# Altium PCB Copy of PCB1.PcbDoc
Units mm, origin at the board's own origin, x right, y up, seen from the top; angles counter-clockwise.
Board outline 40.89 x 79.88 mm, 2 copper layers (Top Layer, Bottom Layer); 35 components, 27 nets, 153 pads, 14 vias.
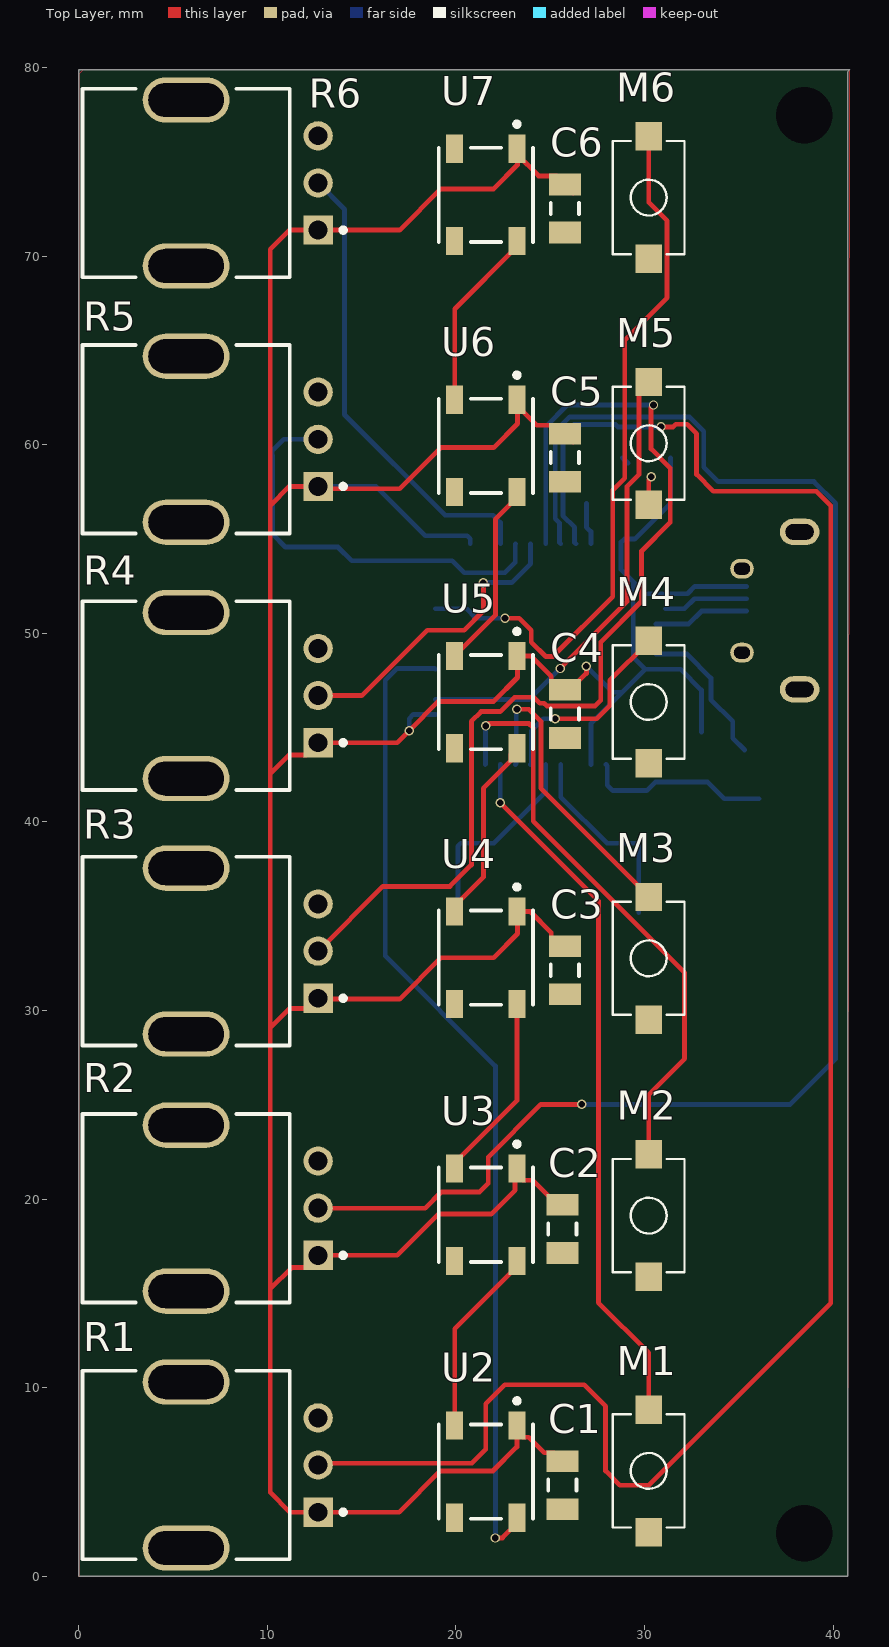
[diagram p0: Top Layer view]
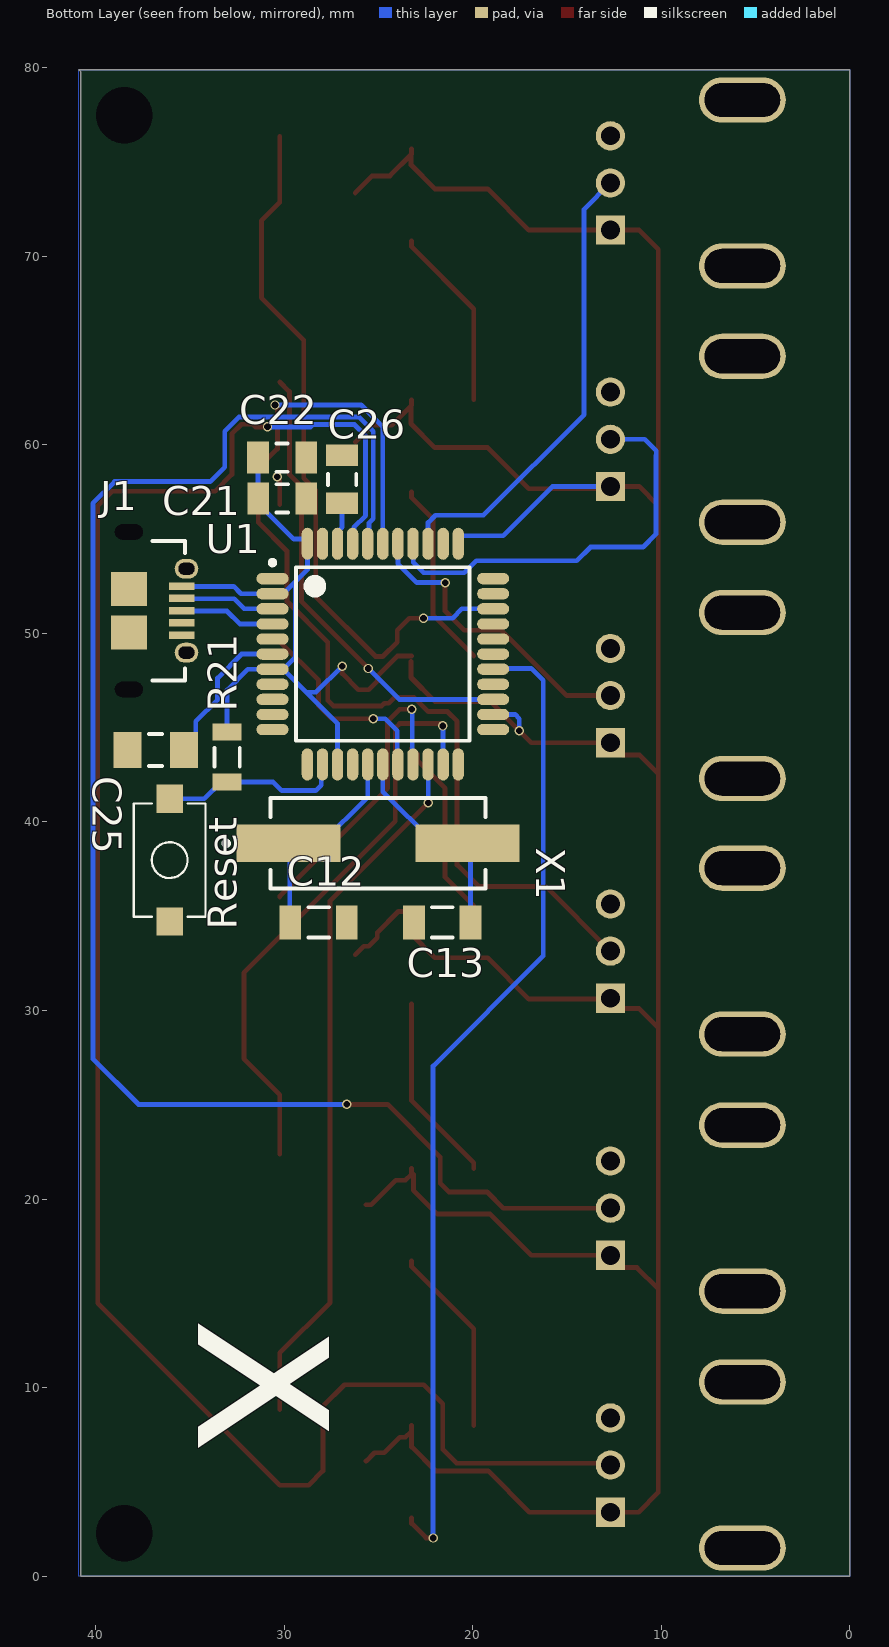
[diagram p1: Bottom Layer view, seen from below]

## Layer stack, top to bottom
Top Solder: solder mask 0.0102, Solder Resist, Dk 3.5
Top Layer: signal copper 0.0356
Dielectric 1: dielectric 0.32, FR-4, Dk 4.8
Bottom Layer: signal copper 0.0356
Bottom Solder: solder mask 0.0102, Solder Resist, Dk 3.5

## Board outline
0,0 40.767,0 40.767,79.756 40.894,79.883 0,79.883

## Design rules (kind name [scope] priority, off if disabled: settings)
AssemblyTestPointUsage [All] p0: scope1count=1 scope1_0_kind=Board scope1_0_value=Board scope2count=1 scope2_0_kind=Board scope2_0_value=Board commentlength=0
AssemblyTestpoint [All] p0: scope1count=1 scope1_0_kind=Board scope1_0_value=Board scope2count=1 scope2_0_kind=Board scope2_0_value=Board commentlength=0
Clearance [All] p0: scope1count=1 scope1_0_kind=Board scope1_0_value=Board scope2count=1 scope2_0_kind=Board scope2_0_value=Board commentlength=0 gap=0.15
Clearance [All] p1: gap=0.15 ignorepadtopadclearanceinfootprint=FALSE except(0: Arc-Hole Track-Hole THPad-Hole Via-Hole Fill-Hole Poly-Hole Region-Hole Text-Hole)
ComponentClearance [All] p0: scope1count=1 scope1_0_kind=Board scope1_0_value=Board scope2count=1 scope2_0_kind=Board scope2_0_value=Board commentlength=0 gap=0.254 collisioncheckmode=3
DiffPairsRouting [All] p0: scope1count=1 scope1_0_kind=Board scope1_0_value=Board scope2count=1 scope2_0_kind=Board scope2_0_value=Board commentlength=0
FabricationTestPointUsage [All] p0: scope1count=1 scope1_0_kind=Board scope1_0_value=Board scope2count=1 scope2_0_kind=Board scope2_0_value=Board commentlength=0 valid=0 allowmultiple=FALSE
FabricationTestpoint [All] p0: scope1count=1 scope1_0_kind=Board scope1_0_value=Board scope2count=1 scope2_0_kind=Board scope2_0_value=Board commentlength=0 side=3 testpointundercomponent=TRUE minsize=1.016 maxsize=2.54 preferedsize=1.524 minholesize=0 maxholesize=1.016 preferedholesize=0.813 testpointgrid=0.025
FanoutControl Fanout_BGA [All] p0 off: scope1count=1 scope1_0_kind=Board scope1_0_value=Board scope2count=1 scope2_0_kind=Board scope2_0_value=Board commentlength=69 // Protel DXP Scope 1 Expression Was: IsBGA   Fanout_BGA (Default Rule)
FanoutControl Fanout_LCC [All] p0 off: scope1count=1 scope1_0_kind=Board scope1_0_value=Board scope2count=1 scope2_0_kind=Board scope2_0_value=Board commentlength=69 // Protel DXP Scope 1 Expression Was: IsLCC   Fanout_LCC (Default Rule)
FanoutControl Fanout_SOIC [All] p0 off: scope1count=1 scope1_0_kind=Board scope1_0_value=Board scope2count=1 scope2_0_kind=Board scope2_0_value=Board commentlength=71 // Protel DXP Scope 1 Expression Was: IsSOIC   Fanout_SOIC (Default Rule)
FanoutControl Fanout_Small [All] p0 off: scope1count=1 scope1_0_kind=Board scope1_0_value=Board scope2count=1 scope2_0_kind=Board scope2_0_value=Board commentlength=84 // Protel DXP Scope 1 Expression Was: (CompPinCount < 5)   Fanout_Small (Default Rule)
FanoutControl Fanout_Default [All] p0: scope1count=1 scope1_0_kind=Board scope1_0_value=Board scope2count=1 scope2_0_kind=Board scope2_0_value=Board commentlength=30 // Fanout_Default (Default Rule)
Height [All] p0: scope1count=1 scope1_0_kind=Board scope1_0_value=Board scope2count=1 scope2_0_kind=Board scope2_0_value=Board commentlength=0
HoleSize [All] p0: scope1count=1 scope1_0_kind=Board scope1_0_value=Board scope2count=1 scope2_0_kind=Board scope2_0_value=Board commentlength=0 absolutevalues=TRUE maxlimit=2.54 minlimit=0.025 maxpercent=80.000 minpercent=20.000
HoleToHoleClearance [All] p0: scope1count=1 scope1_0_kind=Board scope1_0_value=Board scope2count=1 scope2_0_kind=Board scope2_0_value=Board commentlength=0
LayerPairs [All] p0: scope1count=1 scope1_0_kind=Board scope1_0_value=Board scope2count=1 scope2_0_kind=Board scope2_0_value=Board commentlength=0 enforce=TRUE
MinimumSolderMaskSliver [All] p0: scope1count=1 scope1_0_kind=Board scope1_0_value=Board scope2count=1 scope2_0_kind=Board scope2_0_value=Board commentlength=0
NetAntennae [All] p0: scope1count=1 scope1_0_kind=Board scope1_0_value=Board scope2count=1 scope2_0_kind=Board scope2_0_value=Board commentlength=0
PasteMaskExpansion [All] p0: scope1count=1 scope1_0_kind=Board scope1_0_value=Board scope2count=1 scope2_0_kind=Board scope2_0_value=Board commentlength=0 expansion=0
PlaneClearance [All] p0: scope1count=1 scope1_0_kind=Board scope1_0_value=Board scope2count=1 scope2_0_kind=Board scope2_0_value=Board commentlength=0 clearance=0.508
PlaneConnect [All] p0: scope1count=1 scope1_0_kind=Board scope1_0_value=Board scope2count=1 scope2_0_kind=Board scope2_0_value=Board commentlength=0 planeconnectstyle=Relief reliefexpansion=0.508 reliefentries=4 reliefconductorwidth=0.254 reliefairgap=0.254
PolygonConnect [All] p0: scope1count=1 scope1_0_kind=Board scope1_0_value=Board scope2count=1 scope2_0_kind=Board scope2_0_value=Board commentlength=0 connectstyle=Relief reliefconductorwidth=0.254 reliefentries=4 polygonreliefangle="90 Angle"
PolygonConnect [All] p1: connectstyle=Relief reliefconductorwidth=0.254 reliefentries=4 polygonreliefangle="90 Angle" airgapwidth=0.254
RoutingCorners [All] p0: scope1count=1 scope1_0_kind=Board scope1_0_value=Board scope2count=1 scope2_0_kind=Board scope2_0_value=Board commentlength=0 cornerstyle=45-Degree minsetback=2.54 maxsetback=2.54
RoutingLayers [All] p0: scope1count=1 scope1_0_kind=Board scope1_0_value=Board scope2count=1 scope2_0_kind=Board scope2_0_value=Board commentlength=0 top layer=Automatic bottom layer=Automatic
RoutingPriority [All] p0: scope1count=1 scope1_0_kind=Board scope1_0_value=Board scope2count=1 scope2_0_kind=Board scope2_0_value=Board commentlength=0
RoutingTopology [All] p0: scope1count=1 scope1_0_kind=Board scope1_0_value=Board scope2count=1 scope2_0_kind=Board scope2_0_value=Board commentlength=0 topology=Shortest
RoutingVias [All] p0: scope1count=1 scope1_0_kind=Board scope1_0_value=Board scope2count=1 scope2_0_kind=Board scope2_0_value=Board commentlength=0 holewidth=0.35 width=0.5 viastyle="Through Hole" minholewidth=0.35 minwidth=0.5 maxholewidth=0.35 maxwidth=0.5
RoutingVias [All] p1: holewidth=0.35 width=0.5 viastyle="Through Hole" minholewidth=0.35 minwidth=0.5 maxholewidth=0.35 maxwidth=0.5
ShortCircuit [All] p0: scope1count=1 scope1_0_kind=Board scope1_0_value=Board scope2count=1 scope2_0_kind=Board scope2_0_value=Board commentlength=0 allowed=FALSE
SilkToBoardRegionClearance [All] p0: scope1count=1 scope1_0_kind=Board scope1_0_value=Board scope2count=1 scope2_0_kind=Board scope2_0_value=Board commentlength=0
SilkToSilkClearance [All] p0: scope1count=1 scope1_0_kind=Board scope1_0_value=Board scope2count=1 scope2_0_kind=Board scope2_0_value=Board commentlength=0
SilkToSolderMaskClearance [All] p0 off: scope1count=1 scope1_0_kind=Board scope1_0_value=Board scope2count=1 scope2_0_kind=Board scope2_0_value=Board commentlength=44 // Protel DXP Scope 1 Expression Was: IsPad
SolderMaskExpansion [All] p0: scope1count=1 scope1_0_kind=Board scope1_0_value=Board scope2count=1 scope2_0_kind=Board scope2_0_value=Board commentlength=0 expansion=0.102
SolderMaskExpansion [All] p1: expansion=0.102 istentingtop=FALSE
UnRoutedNet [All] p0: scope1count=1 scope1_0_kind=Board scope1_0_value=Board scope2count=1 scope2_0_kind=Board scope2_0_value=Board commentlength=0
UnpouredPolygon [All] p0: scope1count=1 scope1_0_kind=Board scope1_0_value=Board scope2count=1 scope2_0_kind=Board scope2_0_value=Board commentlength=0
Width [All] p0: scope1count=1 scope1_0_kind=Board scope1_0_value=Board scope2count=1 scope2_0_kind=Board scope2_0_value=Board commentlength=0 maxlimit=0.254 minlimit=0.254 preferedwidth=0.254
Width [All] p1: maxlimit=0.254 minlimit=0.254 preferedwidth=0.254
30 further rules are at their usual default settings.

## Components (designator, comment, footprint, x,y, rotation, side; value= is the part's Value field where it differs from the comment)
C1 "" CAPC3216X180X55LL20T25 25.654,4.831 r90 top
C2 "GRM31C5C1E104JA01L" CAPC3216X180X55LL20T25 25.654,18.42 r90 top
C3 "GRM31C5C1E104JA01L" CAPC3216X180X55LL20T25 25.781,32.131 r90 top
C4 "GRM31C5C1E104JA01L" CAPC3216X180X55LL20T25 25.781,45.725 r90 top
C5 "GRM31C5C1E104JA01L" CAPC3216X180X55LL20T25 25.781,59.309 r90 top
C6 "GRM31C5C1E104JA01L" CAPC3216X180X55LL20T25 25.781,72.522 r90 top
C12 "CAP 22nF 50V 1206(3216)" CAPC1206(3216)100_N 28.17,34.671 r0 bottom
C13 "CAP 22nF 50V 1206(3216)" CAPC1206(3216)100_N 21.614,34.671 r180 bottom
C21 "GRM31C5C1E104JA01L" CAPC3216X180X55LL20T25 30.099,57.15 r0 bottom
C22 "GRM31C5C1E104JA01L" CAPC3216X180X55LL20T25 30.104,59.309 r0 bottom
C25 "C1206C105K3RACTU" CAPC3216X180X50ML20T25 36.806,43.815 r0 bottom
C26 "GRM31C5C1E104JA01L" CAPC3216X180X55LL20T25 26.924,58.161 r270 bottom
J1 "629105150921" 629105150921 38.227,51.197 r270 bottom
M1 "434121025816" 434121025816 30.226,5.588 r270 top
M2 "434121025816" 434121025816 30.226,19.125 r270 top
M3 "434121025816" 434121025816 30.226,32.766 r270 top
M4 "434121025816" 434121025816 30.226,46.355 r270 top
M5 "434121025816" 434121025816 30.226,60.071 r270 top
M6 "434121025816" 434121025816 30.226,73.1 r270 top
R1 "PTV09A-4020U-B103" FP-PTV09A-4-MFG 5.7,5.9 r90 top
R2 "PTV09A-4020U-B103" FP-PTV09A-4-MFG 5.7,19.518 r90 top
R3 "PTV09A-4020U-B103" FP-PTV09A-4-MFG 5.7,33.147 r90 top
R4 "PTV09A-4020U-B103" FP-PTV09A-4-MFG 5.7,46.696 r90 top
R5 "PTV09A-4020U-B103" FP-PTV09A-4-MFG 5.7,60.285 r90 top
R6 "PTV09A-4020U-B103" FP-PTV09A-4-MFG 5.7,73.874 r90 top
R21 "ERJ-P08J103V" RESC3216X70X50LL05T20 33.02,43.434 r270 bottom
Reset "434121025816" 434121025816 36.068,37.973 r90 bottom
U1 "ATMEGA32U4-AU" ATML-44ML_M 24.765,48.895 r180 bottom
U2 "WS2812B" ADAI-WS2812B_V 21.591,5.551 r270 top
U3 "WS2812B" ADAI-WS2812B_V 21.591,19.169 r270 top
U4 "WS2812B" ADAI-WS2812B_V 21.591,32.798 r270 top
U5 "WS2812B" ADAI-WS2812B_V 21.591,46.347 r270 top
U6 "WS2812B" ADAI-WS2812B_V 21.591,59.936 r270 top
U7 "WS2812B" ADAI-WS2812B_V 21.591,73.242 r270 top
X1 "9C-3.6864MBBK-T" TXC-9C-2_V 25.019,38.862 r180 bottom locked

## Footprints (in the part's own frame and the unit in brackets; to place one, negate y for a bottom-side part, rotate by r counter-clockwise, add the part's x,y. Pads: shape width x height; smd on the part's side, far side on the other; paste and mask are expansions set on the pad)
434121025816 [mm] "6.0*3.8mm vertical type, SMD, height 2.5mm, black actuator, 160gf, T&R"
  rect 1.5x1.4 smd: 1(-3.25,0) 2(3.25,0)
  silkscreen extent -3,-1.9 3,1.9
629105150921 [mm] "Micro USB 2.0 Type AB Horizontal"
  rect 0.4x1.35 smd: 1(-1.3,2.805) 2(-0.65,2.805) 3(0,2.805) 4(0.65,2.805) 5(1.3,2.805)
  round 0 / inner oval 1.4x2.1 / far side oval 1.4x2.1 hole 0.825 slot 1.5 at 90 deg mask+0: Shell(-4.175,0)
  oval 1.05x1.25 hole 0.65 slot 0.85 at 90 deg: Shell(-2.225,3.055) Shell(2.225,3.055)
  rect 1.8x1.9 smd: Shell(-1.15,0) Shell(1.15,0)
  round 0 / inner round 0 / far side oval 1.4x2.1 hole 0.825 slot 1.5 at 90 deg mask+0: Shell(4.175,0)
  silkscreen extent -3.7,1.25 3.7,2.97
ADAI-WS2812B_V [mm] "SMD, 4-Leads, Body 5x5mm, Pitch 3.3mm"
  rect 1.5x0.9 smd: 1(-2.45,1.65) 2(-2.45,-1.65) 3(2.45,-1.65) 4(2.45,1.65)
  silkscreen extent -3.87,-2.5 2.5,2.5
ATML-44ML_M [mm] "TQFP, 44-Leads, Body 10x10mm, Pitch 0.8mm, IPC Low Density"
  oval 1.7x0.6 smd: 1(-5.85,4) 2(-5.85,3.2) 3(-5.85,2.4) 4(-5.85,1.6) 5(-5.85,0.8) 6(-5.85,0) 7(-5.85,-0.8) 8(-5.85,-1.6) 9(-5.85,-2.4) 10(-5.85,-3.2) 11(-5.85,-4) 23(5.85,-4) 24(5.85,-3.2) 25(5.85,-2.4) 26(5.85,-1.6) 27(5.85,-0.8) 28(5.85,0) 29(5.85,0.8) 30(5.85,1.6) 31(5.85,2.4) 32(5.85,3.2) 33(5.85,4)
  oval 0.6x1.7 smd: 12(-4,-5.85) 13(-3.2,-5.85) 14(-2.4,-5.85) 15(-1.6,-5.85) 16(-0.8,-5.85) 17(0,-5.85) 18(0.8,-5.85) 19(1.6,-5.85) 20(2.4,-5.85) 21(3.2,-5.85) 22(4,-5.85) 34(4,5.85) 35(3.2,5.85) 36(2.4,5.85) 37(1.6,5.85) 38(0.8,5.85) 39(0,5.85) 40(-0.8,5.85) 41(-1.6,5.85) 42(-2.4,5.85) 43(-3.2,5.85) 44(-4,5.85)
  silkscreen extent -5.98,-4.6 4.6,4.97
CAPC1206(3216)100_N [mm] "Chip Capacitor, Body 3.2x1.6mm, Height 1mm, IPC Medium Density"
  rect 1.15x1.8 smd: 1(-1.5,0) 2(1.5,0)
  silkscreen extent -0.55,-0.8 0.55,0.8
CAPC3216X180X50ML20T25 [mm] "Chip Capacitor, 2-Leads, Body 3.40x1.80mm, IPC Low Density"
  rect 1.5x1.9 smd: 1(-1.5,0) 2(1.5,0)
  silkscreen extent -0.35,-0.85 0.35,0.85
CAPC3216X180X55LL20T25 [mm] "Chip Capacitor, 2-Leads, Body 3.4x1.8mm, IPC High Density"
  rect 1.15x1.7 smd: 1(-1.275,0) 2(1.275,0)
  silkscreen extent -0.3,-0.75 0.3,0.75
FP-PTV09A-4-MFG [mm]
  rect 1.55x1.55 hole 1 paste-1000 mask+0: 1(-2.5,-7)
  round 1.55 hole 1 paste-1000 mask+0: 2(0,-7) 3(2.5,-7)
  rrect100% 2.4x4.6 hole 4 slot 1.8 at 0 deg paste-1000 mask+0: 4(-4.4,0) 5(4.4,0)
  silkscreen extent -5,-8.45 5,5.5
RESC3216X70X50LL05T20 [mm] "Chip Resistor, 2-Leads, Body 3.20x1.60mm, IPC High Density"
  rect 0.9x1.55 smd: 1(-1.325,0) 2(1.325,0)
  silkscreen extent -0.5,-0.67 0.5,0.67
TXC-9C-2_V [mm] "SMD, 2-Leads, Body 11.4 x 4.8 mm, Height 4.1 mm"
  rect 5.5x2 smd: 1(-4.75,0) 2(4.75,0)
  silkscreen extent -8.18,-2.4 5.7,2.4

## Part data
C1 C2 C3 C4 C5 C6 C21 C22 C26: library part CMP-2000-06343-1, "Chip Capacitor, 100 nF, +/- 5%, 25 V, -55 to 125 degC, 1206 (3216 Metric), RoHS, Tape and Reel"
C12 C13: library part CMP-1037-03764-1, "CAP 22nF 50V ±5% 1206 (3216 Metric) Thickness 1mm SMD"
C25: library part CMP-2000-04991-1, "Chip Capacitor, 1 uF, +/- 10%, 25 V, -55 to 125 degC, 1206 (3216 Metric), RoHS, Tape and Reel"
J1: library part CMP-1502-03249-1, "Micro USB 2.0 Type AB Receptacle WR-COM, Horizontal, SMT"
M1 M2 M3 M4 M5 M6 Reset: library part CMP-1459-00004-1, "WS-TASV SMD Tact Switch 6.0X3.8 mm"
R1 R2 R3 R4 R5 R6: library part CMP-07234-000013-1, "POT 10K OHM 1/20W CARBON LINEAR"
R21: library part CMP-2003-00715-1
U1: library part CMP-020-00016-2, "8-bit Microcontroller with 32 Kbytes of ISP Flash and USB Controller, 2.7 to 5.5 V, -40 to 85 degC, 44-Pin QFP, Tray"
U2 U3 U4 U5 U6 U7: library part CMP-007-00035-1, "Intelligent Control LED Integrated Light Source, 3.5 to 5.3 V, -25 to 80 degC, 4-Pin SMD, RoHS, Bulk"
X1: library part CMP-0724-00001-1, "9C Series Quartz Crystal, 3.6864 MHz, +/-50 ppm, 20 pF, -40 to 85 degC, 2-Pin 11.4 x 4.8 x 4.1 mm SMD, RoHS, Tape and Reel"

## Free pads (board coordinates)
  round 1.524 hole 3: 1(38.481,2.286) 1(38.481,77.47)

## Via types
v1: diameter 0.5, hole 0.35, Top Layer to Bottom Layer, 14 vias

## Nets (pads, with @x,y where several pads share a name; then routed paths per layer and width w, separated by ;. In a path a pad name is that pad's centre, name@x,y a point inside that pad or via, vN(x,y) a via of type N, cw(c..) or ccw(c..) an arc to the next point about the centre after c; other vN are vias at no path point)
AREF: C26.2 U1.42 | length 2.2
  Bottom Layer w0.254: C26.2 26.924,55.63 27.165,55.389 U1.42
D+: J1.3 U1.4 | length 5.1
  Bottom Layer w0.254: U1.4@30.622,50.502 U1.4 32.342,50.495 33.028,51.181 J1.3@35.422,51.181
D-: J1.2 U1.3 | length 4.5
  Bottom Layer w0.254: U1.3@31.115,51.295 32.118,51.295 32.654,51.831 J1.2@35.422,51.831
GND: C1.1 C2.1 C3.1 C4.1 C5.1 C6.1 C12.1 C13.1 C21.1 C22.1 C25.2 C26.1 J1.5 J1.Shell M1.2 M2.2 M3.2 M4.2 M5.2 M6.2 pad.1 R1.3 R1.4 R1.5 R2.3 R2.4 R2.5 R3.3 R3.4 R3.5 R4.3 R4.4 R4.5 R5.3 R5.4 R5.5 R6.3 R6.4 R6.5 Reset.1 U1.5 U1.15 U1.23 U1.35 U1.43 U2.3 U3.3 U4.3 U5.3 U6.3 U7.3 | length 1.9
  Top Layer w0.254: M5.2 30.226,58.166 v1(30.353,58.293)
  Bottom Layer w0.254: C22.1 C22.1@29.128,59.01
LEDIN: U1.27 U2.4 | length 52.6
  Top Layer w0.254: v1(22.098,2.032) 22.472,2.032 23.241,2.801 U2.4
  Bottom Layer w0.254: U1.27 18.877,48.133 16.891,48.133 16.256,47.498 16.256,32.893 22.098,27.051 v1(22.098,2.032)
M1: M1.1 U1.20 | length 37.5
  Top Layer w0.254: v1(22.352,41.021) 27.559,35.814 27.559,14.51 30.226,11.843 M1.1
  Bottom Layer w0.254: v1(22.352,41.021) 22.359,41.028 22.359,43.039 U1.20
M2: M2.1 U1.21 | length 31.4
  Top Layer w0.254: v1(21.59,45.085) 21.717,45.212 23.876,45.212 24.107,44.981 24.107,40.028 32.131,32.004 32.131,27.438 30.226,25.533 M2.1
  Bottom Layer w0.254: U1.21 21.578,43.058 21.578,45.073 v1(21.59,45.085)
M3: M3.1 U1.19 | length 16.2
  Top Layer w0.254: v1(23.241,45.968) 23.247,45.974 23.876,45.974 24.511,45.339 24.511,41.781 30.226,36.066 M3.1
  Bottom Layer w0.254: U1.19 23.203,43.083 23.203,45.93 v1(23.241,45.968)
M4: M4.1 U1.18 | length 10.8
  Top Layer w0.254: v1(25.273,45.466) 27.474,45.466 28.168,46.16 28.168,47.497 30.226,49.555 M4.1
  Bottom Layer w0.254: U1.18 24.003,43.083 24.003,44.831 24.638,45.466 v1(25.273,45.466)
M5: M5.1 U1.25 | length 24.4
  Top Layer w0.254: v1(25.527,48.133) 29.083,51.689 29.083,57.785 29.718,58.42 29.718,62.813 M5.1
  Bottom Layer w0.254: U1.25 23.889,46.495 v1(25.527,48.133)
M6: M6.1 U1.31 | length 38.2
  Top Layer w0.254: v1(22.606,50.8) 23.368,50.8 24.003,50.165 24.003,49.53 24.765,48.768 25.146,48.768 28.321,51.943 28.321,57.594 28.956,58.229 28.956,65.544 31.203,67.791 31.203,71.868 30.226,72.845 M6.1
  Bottom Layer w0.254: U1.31 18.922,51.302 20.568,51.302 21.069,50.8 v1(22.606,50.8)
NetU2_2: U2.2 U3.4 | length 10.1
  Top Layer w0.254: U2.2 19.941,13.119 23.241,16.419 U3.4
NetU3_2: U3.2 U4.4 | length 10.1
  Top Layer w0.254: U3.2 19.941,21.919 23.241,25.219 U4.4
NetU4_2: U4.2 U5.4 | length 10
  Top Layer w0.254: U4.2 19.941,35.548 21.463,37.07 21.463,41.783 22.918,43.238 22.918,43.574 U5.4
NetU5_2: U5.2 U6.4 | length 10.1
  Top Layer w0.254: U5.2 22.098,50.954 22.098,56.043 23.241,57.186 U6.4
NetU6_2: U6.2 U7.4 | length 9.8
  Top Layer w0.254: U6.2 19.941,67.192 23.241,70.492 U7.4
P1: R1.2 U1.41 | length 104.5
  Top Layer w0.254: R1.2 12.792,5.992 20.851,5.992 21.59,6.731 21.59,9.144 22.606,10.16 26.797,10.16 27.94,9.017 27.94,5.588 28.702,4.826 30.226,4.826 39.878,14.478 39.878,56.769 39.116,57.531 33.655,57.531 32.766,58.42 32.766,60.579 32.258,61.087 31.666,61.087 31.52,60.941 v1(30.88,60.941)
  Bottom Layer w0.254: U1.41 26.299,54.811 26.299,55.616 25.677,56.238 25.677,60.475 26.266,61.064 28.469,61.064 28.592,60.941 v1(30.88,60.941)
P2: R2.2 U1.40 | length 85.3
  Top Layer w0.254: R2.2 18.375,19.518 19.241,20.384 21.273,20.384 21.717,20.828 21.717,22.225 24.511,25.019 v1(26.67,25.019)
  Bottom Layer w0.254: U1.40 25.499,54.811 25.499,55.845 25.273,56.071 25.273,60.706 26.035,61.468 32.385,61.468 33.147,60.706 33.147,58.801 33.909,58.039 38.989,58.039 40.132,56.896 40.132,27.432 37.719,25.019 v1(26.67,25.019)
P3: R3.2 U1.39 | length 55.4
  Top Layer w0.254: R3.2 16.129,36.576 19.685,36.576 20.828,37.719 20.828,45.339 21.336,45.847 22.352,45.847 23.114,46.609 24.13,46.609 24.45,46.289 24.675,46.289 24.816,46.148 27.396,46.148 27.686,46.438 27.686,49.53 29.845,51.689 29.845,54.356 31.369,55.88 31.369,58.759 30.353,59.775 30.353,61.976 v1(30.48,62.103)
  Bottom Layer w0.254: U1.39 24.765,60.96 25.908,62.103 v1(30.48,62.103)
P4: R4.2 U1.38 | length 16.1
  Top Layer w0.254: R4.2 15.014,46.696 18.483,50.165 20.447,50.165 21.463,51.181 v1(21.463,52.686)
  Bottom Layer w0.254: v1(21.463,52.686) 22.968,52.686 23.965,53.683 U1.38
P5: R5.2 U1.37 | length 22
  Bottom Layer w0.254: R5.2 10.882,60.285 10.265,59.668 10.265,59.458 10.287,59.436 10.287,55.245 10.958,54.574 13.752,54.574 14.478,53.848 19.812,53.848 20.447,53.213 22.606,53.213 23.149,53.756 23.149,54.729 U1.37
P6: R6.2 U1.36 | length 24.6
  Bottom Layer w0.254: R6.2 14.097,72.477 14.097,61.595 19.431,56.261 21.971,56.261 22.365,55.867 U1.36
RESET: R21.2 Reset.2 U1.13 | length 9.8
  Bottom Layer w0.254: U1.13 28.031,42.979 28.031,41.946 28.321,41.656 30.12,41.656 30.573,42.109 R21.2 33.345,42.109 34.231,41.223 Reset.2
UCAP: C25.1 U1.6 | length 8
  Bottom Layer w0.254: U1.6 32.258,48.895 33.528,47.625 33.528,46.482 34.683,45.327 34.683,44.438 C25.1
VCC: C1.2 C2.2 C3.2 C4.2 C5.2 C6.2 C21.2 C22.2 J1.1 R1.1 R2.1 R3.1 R4.1 R5.1 R6.1 R21.1 U1.2 U1.7 U1.14 U1.24 U1.34 U1.44 U2.1 U3.1 U4.1 U5.1 U6.1 U7.1 | length 231.1
  Top Layer w0.254: R2.1@12.602,17.018 R2.1 ; R3.1 12.152,30.099 11.176,30.099 10.16,29.083 ; R4.1 12.052,43.548 11.163,43.548 10.16,42.545 ; R5.1 11.176,57.785 10.16,56.769 ; R6.1 11.176,71.374 10.16,70.358 10.16,56.769 ; R3.1@12.729,30.607 17.018,30.607 19.206,32.795 22,32.795 23.27,34.065 U4.1@23.27,34.908 ; R4.1@12.729,44.196 16.891,44.196 v1(17.526,44.831) 19.079,46.384 22,46.384 23.27,47.654 U5.1@23.27,48.497 ; R5.1@12.729,57.658 17.018,57.658 19.206,59.846 22,59.846 23.27,61.116 U6.1@23.27,61.959 ; R6.1@12.729,71.374 17.018,71.374 19.206,73.562 22,73.562 23.27,74.832 U7.1@23.27,75.363 ; U3.1@23.143,21.319 23.143,20.476 21.873,19.206 19.079,19.206 16.891,17.018 R2.1 ; U2.1 U2.1@23.241,7.701 ; U3.1 23.241,21.319 23.564,20.996 24.078,20.996 25.379,19.695 C2.2 ; U4.1 23.939,35.248 25.058,34.129 25.058,33.854 25.506,33.406 C3.2 C3.2@26.229,32.958 ; U5.1 23.984,48.797 25.058,47.723 25.058,47.448 25.506,47 C4.2 26.056,47 26.924,47.868 v1(26.924,48.26) ; U6.1 23.241,62.086 24.295,61.032 25.333,61.032 C5.2 C5.2@26.229,60.136 ; U7.1 23.241,75.392 U7.1@23.27,75.363 ; U7.1@23.27,75.392 U7.1@23.27,75.363 ; C1.2 25.206,6.554 24.688,6.554 23.864,7.378 23.564,7.378 U2.1@23.241,7.701 ; C6.2@26.229,73.349 C6.2 25.333,74.245 24.388,74.245 U7.1@23.27,75.363 ; 10.16,15.24 10.16,29.083 ; 10.16,15.24 10.16,4.445 11.205,3.4 R1.1 16.989,3.4 19.177,5.588 21.971,5.588 23.241,6.858 U2.1@23.241,7.701 ; 10.16,15.24 11.29,16.37 12.052,16.37 R2.1 ; 10.16,29.083 10.16,42.545 ; 10.16,42.545 10.16,56.769
  Bottom Layer w0.254: R5.1 15.765,57.785 18.382,55.168 20.605,55.168 20.765,55.008 U1.34 ; v1(17.526,44.831) 17.526,45.466 17.755,45.695 U1.24 ; v1(26.924,48.26) 28.315,46.869 28.823,46.869 ; U1.14 27.165,45.211 28.823,46.869 ; C22.2 31.379,57.155 C21.2 31.374,56.875 29.49,54.991 28.925,54.991 28.765,54.831 U1.44 28.765,53.379 29.407,52.737 ; R21.1 33.02,46.99 31.915,48.095 U1.7 U1.7@30.049,48.095 ; J1.1@35.422,52.481 32.669,52.481 32.283,52.095 U1.2 30.049,52.095 29.407,52.737 ; 28.823,46.869 U1.7@30.049,48.095 ; 29.407,52.737 29.407,48.737 U1.7@30.049,48.095
XTAL1: C13.2 U1.17 X1.2 | length 10.8
  Bottom Layer w0.254: C13.2@20.114,35.179 20.114,38.707 X1.2 22.019,38.862 24.765,41.608 U1.17
XTAL2: C12.2 U1.16 X1.1 | length 10.5
  Bottom Layer w0.254: U1.16 25.565,41.316 28.019,38.862 29.591,38.862 29.694,38.759 C12.2@29.694,35.179
pads on no net: J1.4 U1.1 U1.8 U1.9 U1.10 U1.11 U1.12 U1.22 U1.26 U1.28 U1.29 U1.30 U1.32 U1.33 U7.2

## Polygon pours and split planes (outlines as drawn)
GND on Top Layer "GND_L01_P001" (solid, pour order 1): 40.894,79.883 0.254,79.883 0,79.629 0,0 40.767,0
GND on Bottom Layer "GND_L02_P003" (solid, pour order 3): 0,0 40.894,0 40.894,79.883 0,79.883

## Silkscreen, mask and mechanical layers (free items; w line width, h text height)
Bottom Overlay:
  text "X" at 38.354,6.477 h20 r90

## Text inside footprints (layer, text, board x,y; h text height)
J1: Mechanical 2 "PCB Edge" at 40.227,52.297 h0.41 r90
R1: Top 3D Body "GRM31C5C1E104JA01L" at 23.939,1.516 h1.52